# EAGLE board hexapod (EAGLE 4.90)
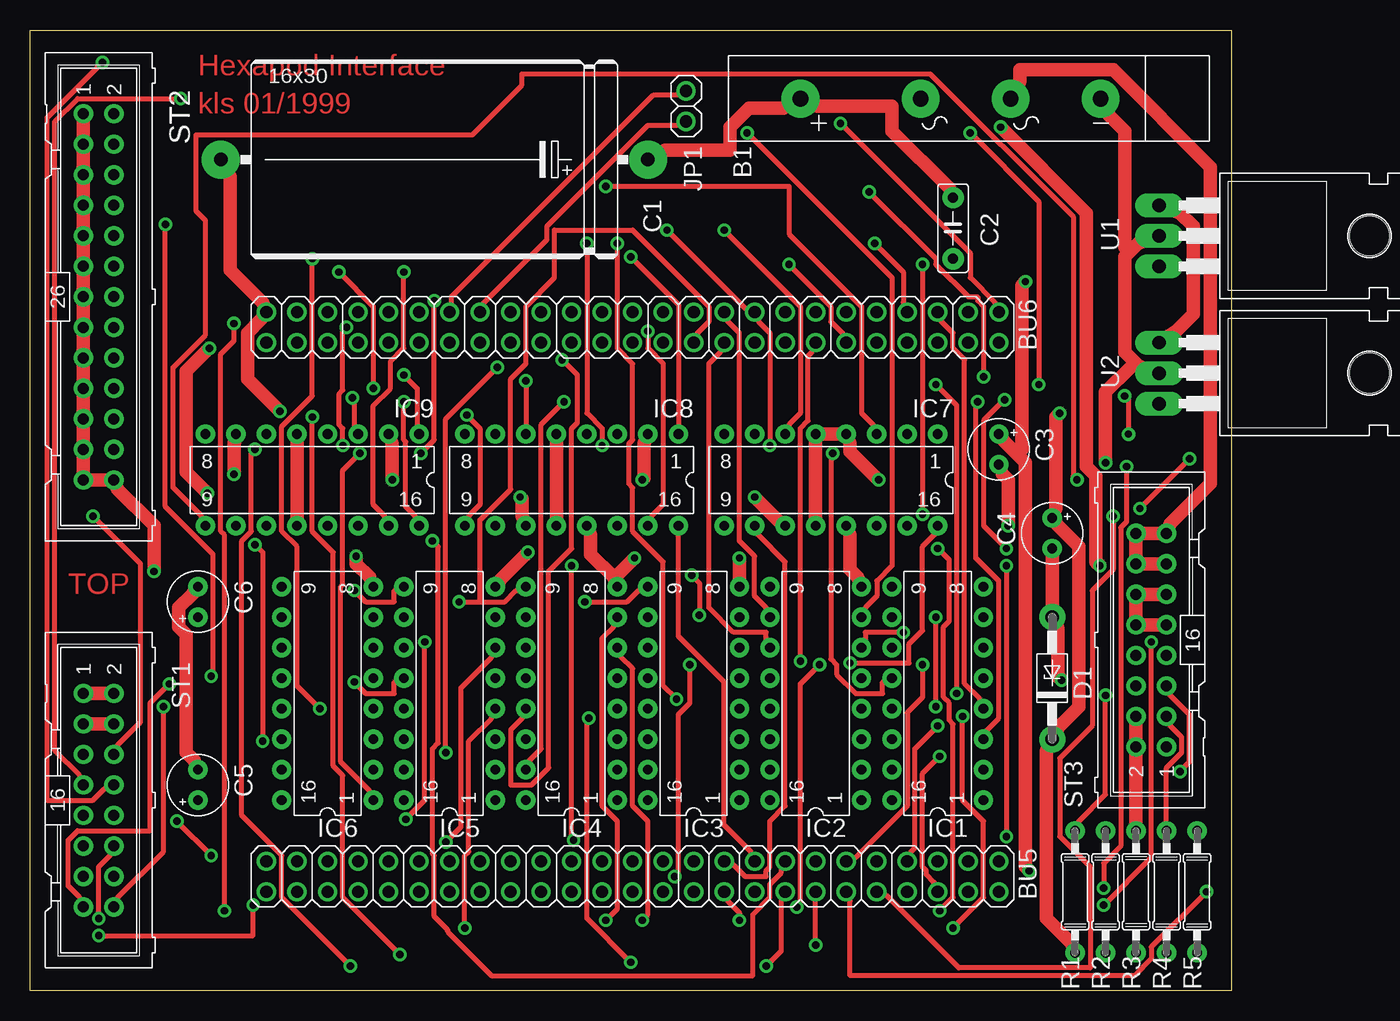
[diagram p0: board, top side]
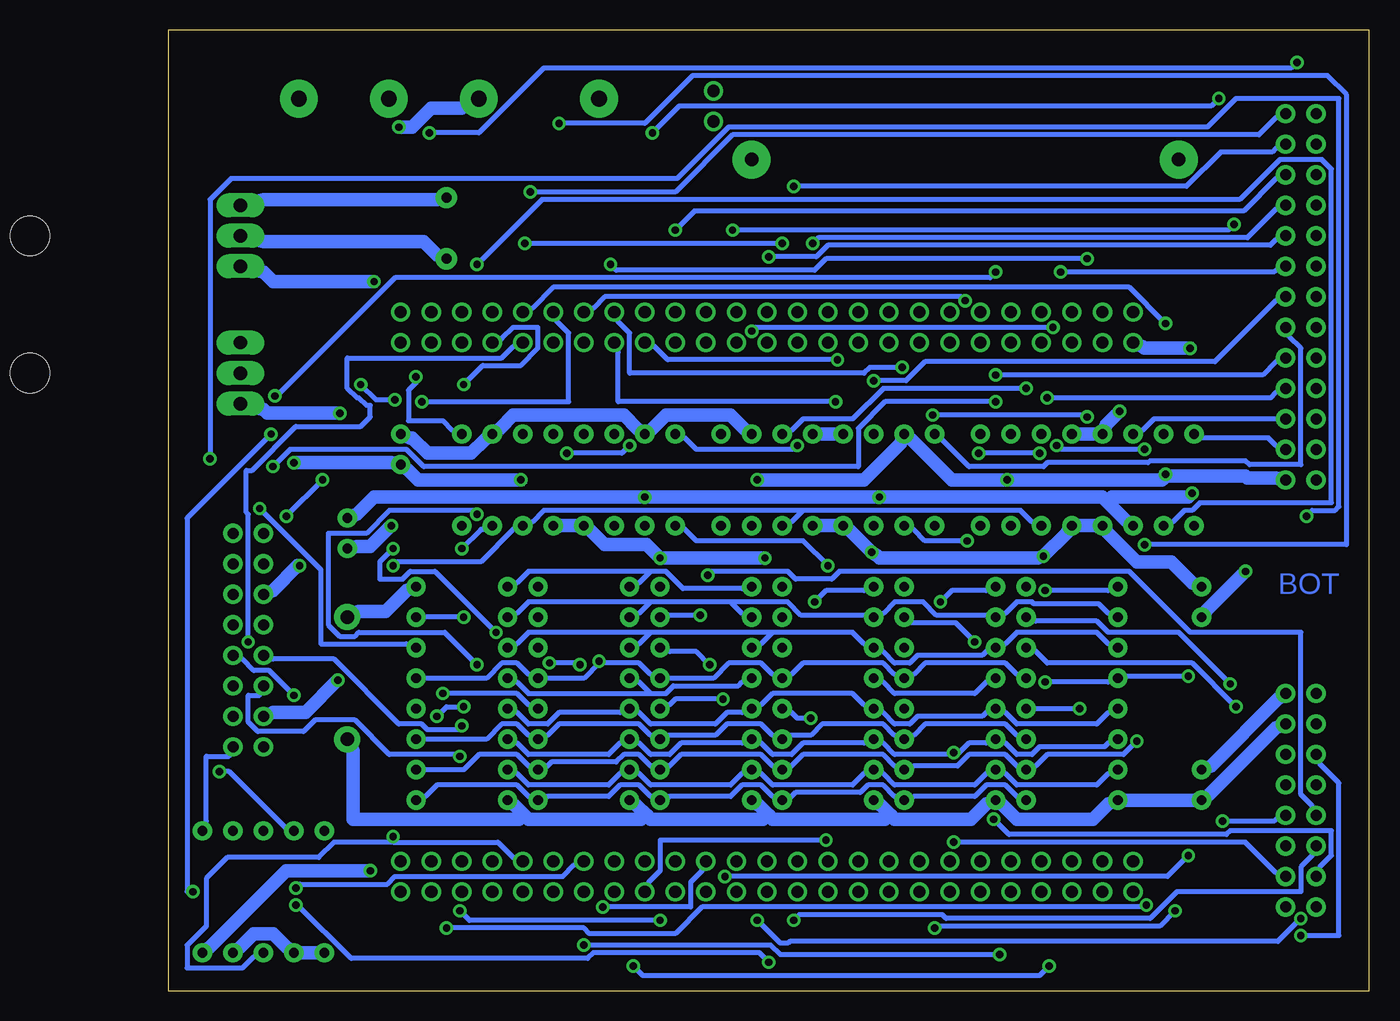
[diagram p1: board, bottom side, seen from below]

Size 100 x 80 mm. Coordinates in mm from the lower left corner, seen from the top.
Outline: 0,0 0,80 100,80 100,0 0,0
Copper layers (1*16): Top 0.035mm / dielectric 1.5mm / Bottom 0.035mm
Design rules "default": minimum track width 10mil, minimum drill 24mil, track to track 8mil, track to pad 8mil, pad to pad 8mil, via to via 8mil, smd to smd 8mil, copper to edge 40mil, drill to drill 8mil, minimum pad ring 10mil, minimum via ring 10mil, stop-mask expansion 0mil, vias tented up to drill 0mil, thermal gap 10mil
Net classes: 0 default: width 0.406 mm; 1 supply: width 1.143 mm

## Footprints (pad centres in the part's own frame; a part is rotated, then mirrored left to right if it is on the bottom)
FB100 = drill 1.321 pad 3.15 round: + 0,0; - 24.994,0; AC1 10.008,0; AC2 17.501,0
2X25 = drill 1.016 pad 1.6 round: 1 -30.48,-1.27; 2 -30.48,1.27; 3 -27.94,-1.27; 4 -27.94,1.27; 5 -25.4,-1.27; 6 -25.4,1.27; 7 -22.86,-1.27; 8 -22.86,1.27; 9 -20.32,-1.27; 10 -20.32,1.27; 11 -17.78,-1.27; 12 -17.78,1.27; 13 -15.24,-1.27; 14 -15.24,1.27; 15 -12.7,-1.27; 16 -12.7,1.27; 17 -10.16,-1.27; 18 -10.16,1.27; 19 -7.62,-1.27; 20 -7.62,1.27; 21 -5.08,-1.27; 22 -5.08,1.27; 23 -2.54,-1.27; 24 -2.54,1.27; 25 0,-1.27; 26 0,1.27; 27 2.54,-1.27; 28 2.54,1.27; 29 5.08,-1.27; 30 5.08,1.27; 31 7.62,-1.27; 32 7.62,1.27; 33 10.16,-1.27; 34 10.16,1.27; 35 12.7,-1.27; 36 12.7,1.27; 37 15.24,-1.27; 38 15.24,1.27; 39 17.78,-1.27; 40 17.78,1.27; 41 20.32,-1.27; 42 20.32,1.27; 43 22.86,-1.27; 44 22.86,1.27; 45 25.4,-1.27; 46 25.4,1.27; 47 27.94,-1.27; 48 27.94,1.27; 49 30.48,-1.27; 50 30.48,1.27
E35-16 = drill 1.118 pad 3.15 round: + -17.78,0; - 17.78,0
C5B2,5A = drill 0.813 pad 1.778 round: 1 -2.54,0; 2 2.54,0
E2,5-5 = drill 0.813 pad 1.6 round: + -1.27,0; - 1.27,0
DO41Z10 = drill 1.118 pad 2.159 round: A 5.08,0; K -5.08,0
DIL-16 = drill 0.813 pad 1.6 round: 1 -8.89,-3.81; 2 -6.35,-3.81; 3 -3.81,-3.81; 4 -1.27,-3.81; 5 1.27,-3.81; 6 3.81,-3.81; 7 6.35,-3.81; 8 8.89,-3.81; 9 8.89,3.81; 10 6.35,3.81; 11 3.81,3.81; 12 1.27,3.81; 13 -1.27,3.81; 14 -3.81,3.81; 15 -6.35,3.81; 16 -8.89,3.81
1X02 = drill 1.016 pad 1.6 round: 1 -1.27,0; 2 1.27,0
0207/10 = drill 0.813 pad 1.6 round: 1 -5.08,0; 2 5.08,0
0207/10@1 = drill 0.813 pad 1.6 round: 1 -5.08,0; 2 5.08,0
ML16 = drill 0.914 pad 1.6 round: 1 -8.89,-1.27; 2 -8.89,1.27; 3 -6.35,-1.27; 4 -6.35,1.27; 5 -3.81,-1.27; 6 -3.81,1.27; 7 -1.27,-1.27; 8 -1.27,1.27; 9 1.27,-1.27; 10 1.27,1.27; 11 3.81,-1.27; 12 3.81,1.27; 13 6.35,-1.27; 14 6.35,1.27; 15 8.89,-1.27; 16 8.89,1.27
ML26 = drill 0.914 pad 1.6 round: 1 -15.24,-1.27; 2 -15.24,1.27; 3 -12.7,-1.27; 4 -12.7,1.27; 5 -10.16,-1.27; 6 -10.16,1.27; 7 -7.62,-1.27; 8 -7.62,1.27; 9 -5.08,-1.27; 10 -5.08,1.27; 11 -2.54,-1.27; 12 -2.54,1.27; 13 0,-1.27; 14 0,1.27; 15 2.54,-1.27; 16 2.54,1.27; 17 5.08,-1.27; 18 5.08,1.27; 19 7.62,-1.27; 20 7.62,1.27; 21 10.16,-1.27; 22 10.16,1.27; 23 12.7,-1.27; 24 12.7,1.27; 25 15.24,-1.27; 26 15.24,1.27
TO220H = drill 1.118 pad 2 long: 1 -2.54,-6.35; 2 0,-6.35; 3 2.54,-6.35 | hole 3.302: 0,11.176

## Placement (x,y rotation side)
B1  FB100  [FB100]  64.14,74.3 0 top
BU5  PINHD-2X25  [2X25]  50.16,9.53 180 top
BU6  PINHD-2X25  [2X25]  50.16,55.24 180 top
C1  2200uF/35V  [E35-16]  33.66,69.22 180 top
C2  100nf  [C5B2,5A]  76.83,63.5 90 top
C3  4,7uf/35V  [E2,5-5]  80.64,45.09 270 top
C4  4,7uf/10V  [E2,5-5]  85.09,38.1 270 top
C5  4,7uf/10V  [E2,5-5]  13.97,17.14 90 top
C6  4,7uf/35V  [E2,5-5]  13.97,32.38 90 top
D1  BZX85  [DO41Z10]  85.09,26.04 90 top
IC1  HCTL2016  [DIL-16]  75.56,24.77 90 top
IC2  HCTL2016  [DIL-16]  65.41,24.77 90 top
IC3  HCTL2016  [DIL-16]  55.24,24.77 90 top
IC4  HCTL2016  [DIL-16]  45.09,24.77 90 top
IC5  HCTL2016  [DIL-16]  34.92,24.77 90 top
IC6  HCTL2016  [DIL-16]  24.77,24.77 90 top
IC7  DS3668  [DIL-16]  66.67,42.55 180 top
IC8  DS3668  [DIL-16]  45.09,42.55 180 top
IC9  DS3668  [DIL-16]  23.5,42.55 180 top
JP1  PINHD-1X2  [1X02]  54.61,73.66 270 top
R1  0207/10  [0207/10]  87,8.26 90 top
R2  0207/10  [0207/10]  89.53,8.26 90 top
R3  10k  [0207/10@1]  92.08,8.26 270 top
R4  0207/10  [0207/10]  94.61,8.26 90 top
R5  0207/10  [0207/10]  97.16,8.26 90 top
ST1  PINHD-2X8  [ML16]  5.71,15.88 270 top
ST2  PINHD-2X13  [ML26]  5.71,57.78 270 top
ST3  PINHD-2X8  [ML16]  93.34,29.21 90 top
U1  78S24  [TO220H]  100.33,62.87 270 top
U2  7805  [TO220H]  100.33,51.44 270 top

## Library data of the parts
B1 = RECTIF
BU5 BU6 JP1 = PINHEAD
C1 C3-C6 = ELKO
C2 = CAP-WI
D1 = diode
IC1-IC9 = klaus
R1-R5 = R
ST1-ST3 = ST-ML
U1 U2 = LINEAR

## Nets
!OE0: BU6.5 IC1.4
!OE1: BU6.8 IC2.4
!OE2: BU6.7 IC3.4
!OE3: BU6.10 IC4.4
!OE4: BU6.9 IC5.4
!OE5: BU6.12 IC6.4
!RST: BU6.14 IC1.5 IC2.5 IC3.5 IC4.5 IC5.5 IC6.5
+5V [supply]: BU6.50 C4.+ C5.+ D1.K IC1.16 IC2.16 IC3.16 IC4.16 IC5.16 IC6.16 IC7.11 IC8.11 IC9.11 R1.1 R2.1 R4.1 ST1.3 ST1.4 U2.3
+24V [supply]: C3.+ C6.+ IC7.2 IC7.7 IC8.2 IC8.7 IC9.2 IC9.7 R5.1 ST2.1 ST2.3 ST2.5 ST2.7 ST2.9 ST2.11 ST2.13 ST2.15 ST2.17 ST2.19 ST2.21 ST2.23 ST2.25 ST2.26 U1.3
AC1 [supply]: B1.AC1 ST3.9 ST3.10 ST3.11 ST3.12
AC2 [supply]: B1.AC2 ST3.13 ST3.14 ST3.15 ST3.16
CLK: BU6.1 IC1.2 IC2.2 IC3.2 IC4.2 IC5.2 IC6.2
COIL0: IC7.1 ST2.2
COIL1: IC7.3 ST2.4
COIL2: IC7.6 ST2.6
COIL3: IC7.8 ST2.8
COIL4: IC8.1 ST2.10
COIL5: IC8.3 ST2.12
COIL6: IC8.6 ST2.14
COIL7: IC8.8 ST2.16
COIL8: IC9.1 ST2.18
COIL9: IC9.3 ST2.20
COIL10: IC9.6 ST2.22
COIL11: IC9.8 ST2.24
D0: BU6.13 IC1.1 IC2.1 IC3.1 IC4.1 IC5.1 IC6.1
D1: BU6.16 IC1.15 IC2.15 IC3.15 IC4.15 IC5.15 IC6.15
D2: BU6.15 IC1.14 IC2.14 IC3.14 IC4.14 IC5.14 IC6.14
D3: BU6.18 IC1.13 IC2.13 IC3.13 IC4.13 IC5.13 IC6.13
D4: BU6.17 IC1.12 IC2.12 IC3.12 IC4.12 IC5.12 IC6.12
D5: BU6.20 IC1.11 IC2.11 IC3.11 IC4.11 IC5.11 IC6.11
D6: BU6.19 IC1.10 IC2.10 IC3.10 IC4.10 IC5.10 IC6.10
D7: BU6.22 IC1.9 IC2.9 IC3.9 IC4.9 IC5.9 IC6.9
EN: BU5.9 IC7.14 IC8.14 IC9.14 R3.2
ENC0: IC1.7 ST1.5
ENC1: IC1.6 ST1.6
ENC2: IC2.7 ST1.7
ENC3: IC2.6 ST1.8
ENC4: IC3.7 ST1.9
ENC5: IC3.6 ST1.10
ENC6: IC4.7 ST1.11
ENC7: IC4.6 ST1.12
ENC8: IC5.7 ST1.13
ENC9: IC5.6 ST1.14
ENC10: IC6.7 ST1.15
ENC11: IC6.6 ST1.16
GND [supply]: B1.- BU6.49 C1.- C2.1 C3.- C4.- C5.- C6.- D1.A IC1.8 IC2.8 IC3.8 IC4.8 IC5.8 IC6.8 IC7.4 IC7.5 IC7.12 IC7.13 IC8.4 IC8.5 IC8.12 IC8.13 IC9.4 IC9.5 IC9.12 IC9.13 R3.1 ST1.1 ST1.2 ST3.2 ST3.4 U1.2 U2.2
N$4: R5.2 ST3.1
N$5: R4.2 ST3.3
N$6: R2.2 ST3.5
N$7: R1.2 ST3.7
N$8: BU6.35 JP1.2
N$9: BU6.37 JP1.1
SEL: BU6.11 IC1.3 IC2.3 IC3.3 IC4.3 IC5.3 IC6.3
STATUS0: BU5.7 ST3.8
STATUS1: BU5.6 ST3.6
VALVE0: BU5.21 IC7.16
VALVE1: BU5.20 IC7.15
VALVE2: BU5.19 IC7.10
VALVE3: BU5.18 IC7.9
VALVE4: BU5.17 IC8.16
VALVE5: BU5.16 IC8.15
VALVE6: BU5.15 IC8.10
VALVE7: BU5.14 IC8.9
VALVE8: BU5.13 IC9.16
VALVE9: BU5.12 IC9.15
VALVE10: BU5.11 IC9.10
VALVE11: BU5.10 IC9.9
VIN [supply]: B1.+ C1.+ C2.2 U1.1 U2.1

## Tracks (layer width: path | path; a pad name or v marks a point on that pad's centre or on a via)
!OE0
  Top 0.406: IC1.4 79.06,24.29 77.79,25.56 77.79,52.55 76.83,53.5 76.83,54.77 75.88,55.72 BU6.5
!OE1  (via drill 0.61)
  Top 0.406: v77.15,24.77 77.15,48.74 v75.41,50.48
  Bottom 0.406: v77.15,24.77 70.96,24.77 70.01,23.81 IC2.4 | v75.41,50.48 73.82,52.07 70.64,52.07 69.22,53.5 69.22,55.24 71.28,55.24 72.23,54.29 BU6.8
!OE2  (via drill 0.61)
  Top 0.406: v53.82,24.29 52.7,25.4 52.7,35.72 50.16,38.26 50.16,41.91 49.85,42.23 49.85,45.56 50.16,45.88 50.16,52.23 48.9,53.5 v48.9,62.23 | v70.33,62.23 72.71,59.85 72.71,57.31 BU6.7
  Bottom 0.406: v53.82,24.29 57.78,24.29 58.26,23.81 IC3.4 | v48.9,62.23 v70.33,62.23
!OE3  (via drill 0.61)
  Top 0.406: v46.51,22.7 46.35,22.54 46.35,6.03 v50.01,2.38 | v89.38,7.14 93.34,11.11 v93.34,29.05
  Bottom 0.406: v46.51,22.7 47.62,22.7 48.1,23.18 IC4.4 | v50.01,2.38 50.8,3.17 64.61,3.17 65.09,2.7 84.77,2.7 89.22,7.14 v89.38,7.14 | v93.34,29.05 93.34,39.69 93.5,39.85 93.5,43.34 93.03,43.34 89.38,46.99 83.98,46.99 83.19,47.78 83.19,48.74 83.5,48.74 84.14,49.37 84.3,49.37 85.09,50.16 85.09,52.7 72.23,52.7 71.28,53.66 BU6.10
!OE4  (via drill 0.61)
  Top 0.406: v36.2,5.24 36.2,11.27 36.51,11.59 36.51,20.8 38.42,22.7 IC5.4 | v16.19,6.67 16.19,37.94 15.88,38.26 15.88,53.02 16.99,54.13 v16.99,55.56
  Bottom 0.406: v36.2,5.24 36.04,5.4 17.46,5.4 v16.19,6.67 | v16.99,55.56 20,58.58 67.94,58.58 69.69,56.83 BU6.9
!OE5  (via drill 0.61)
  Top 0.406: v24.13,23.5 22.23,25.4 22.23,36.99 20.95,38.26 20.95,46.99 23.5,49.53 v23.5,60.96 | v63.18,60.48 66.67,56.99 66.67,55.72 67.63,54.77 BU6.12
  Bottom 0.406: v24.13,23.5 27.78,23.5 IC6.4 | v23.5,60.96 45.24,60.96 46.2,60.01 62.71,60.01 v63.18,60.48
!RST  (via drill 0.61)
  Top 0.406: v64.14,27.46 64.14,46.83 64.77,47.47 64.77,52.86 65.09,53.18 BU6.14
  Bottom 0.406: IC6.5 29.37,26.35 30.32,27.3 36.99,27.3 37.94,26.35 IC5.5 39.53,26.35 40.48,27.3 47.15,27.3 48.1,26.35 IC4.5 49.69,26.35 50.64,27.3 53.34,27.3 54.61,26.04 58.26,26.04 IC3.5 59.85,26.35 60.8,27.3 64.14,27.3 | 64.14,27.3 65.41,26.04 68.42,26.04 IC2.5 70.01,26.35 70.96,27.3 72.23,27.3 73.5,26.04 78.58,26.04 IC1.5 | 64.14,27.3 v64.14,27.46
+5V  (via drill 0.61)
  Top 1.143: v40.8,41.12 40.96,40.96 40.96,39.53 IC8.11 | v60.33,41.12 62.23,39.21 IC7.11 | v14.92,53.5 13.02,51.59 13.02,43.18 v14.76,41.43 | v85.72,48.1 85.41,47.78 85.41,40.16 C4.+ 85.57,38.73 87.31,36.99 87.31,23.65 85.57,21.91 D1.K 84.61,20 84.61,6.03 86.68,3.97 R1.1 | ST1.3 5.24,22.23 6.19,22.23 ST1.4
  Bottom 1.143: 21.83,40.72 22.23,41.12 v40.8,41.12 v60.33,41.12 82.87,41.12 84.3,39.69 C4.+ | 21.83,40.72 20.32,39.21 IC9.11 | v14.92,53.5 18.73,53.5 18.89,53.66 BU6.50 | v14.76,41.43 15.08,41.12 21.43,41.12 21.83,40.72 | R1.1 87.79,3.17 88.74,3.17 R2.1 90.17,3.65 91.28,4.76 92.87,4.76 93.98,3.65 R4.1 | v85.72,48.1 91.76,48.1 92.08,48.42 U2.3 | ST1.4 7.78,21.91 13.34,16.35 C5.+ 14.76,15.88 20.16,15.88 IC6.16 21.75,15.56 23.02,14.29 29.37,14.29 30.48,15.4 IC5.16 31.91,15.56 33.18,14.29 39.53,14.29 39.93,14.68 | 39.93,14.68 40.64,15.4 IC4.16 | 50.09,14.68 49.69,14.29 40.32,14.29 39.93,14.68 | 50.09,14.68 50.8,15.4 IC3.16 | 60.25,14.68 59.85,14.29 50.48,14.29 50.09,14.68 | 60.25,14.68 60.96,15.4 IC2.16 | 70.41,14.68 70.01,14.29 60.64,14.29 60.25,14.68 | 70.41,14.68 71.12,15.4 IC1.16 | D1.K 84.61,20 84.61,14.29 70.8,14.29 70.41,14.68
+24V  (via drill 0.61)
  Top 1.143: v30.16,42.55 30.16,45.56 IC9.2 | ST2.1 ST2.3 ST2.5 ST2.7 ST2.9 ST2.11 ST2.13 ST2.15 ST2.17 ST2.19 ST2.21 ST2.23 ST2.25 5.24,42.55 6.19,42.55 ST2.26 7.3,41.75 10.32,38.73 v10.32,34.92 | v16.99,43.02 16.99,45.56 IC9.7 | v83.19,10 82.87,10.32 82.87,43.97 82.15,44.69 | 82.15,44.69 81.12,45.72 C3.+ | v82.87,59.05 82.55,58.74 82.55,45.09 82.15,44.69 | v50.96,42.55 51.12,42.7 51.12,45.56 IC8.2
  Bottom 1.143: v10.32,34.92 13.49,31.75 C6.+ | 16.91,42.94 16.83,42.86 10.32,42.86 10.16,42.7 7.78,42.7 ST2.26 | 16.91,42.94 v16.99,43.02 | 16.91,42.94 17.3,42.55 v30.16,42.55 34.77,42.55 38.1,45.88 IC8.7 39.05,45.56 42.07,42.55 v50.96,42.55 | IC8.2 52.07,46.83 53.18,47.94 58.58,47.94 59.69,46.83 IC7.7 60.96,46.83 62.07,47.94 71.28,47.94 72.39,46.83 IC7.2 73.66,45.88 74.77,44.77 78.42,44.77 79.69,46.04 79.85,46.04 C3.+ | v83.19,10 90.17,10 96.52,3.65 R5.1 | v82.87,59.05 91.28,59.05 92.08,59.85 U1.3
AC1  (via drill 0.61)
  Top 1.143: ST3.9 93.82,30.48 92.87,30.48 ST3.10 ST3.12 92.87,33.02 93.82,33.02 ST3.11 | v89.06,35.4 88.74,35.72 88.74,42.86 87.95,43.66 87.95,64.77 v80.8,71.91
  Bottom 1.143: v89.06,35.4 89.22,35.4 91.28,33.34 ST3.12 | v80.8,71.91 79.69,71.91 78.11,73.5 75.56,73.5 B1.AC1
AC2
  Top 1.143: ST3.13 93.82,35.56 92.87,35.56 ST3.14 ST3.16 92.87,38.1 93.82,38.1 ST3.15 94.93,38.89 98.27,42.23 98.27,68.58 90.17,76.68 82.39,76.68 82.39,75.72 B1.AC2
CLK  (via drill 0.61)
  Top 0.406: v67.47,72.23 78.26,61.44 78.26,59.37 80.33,57.31 BU6.1 | v18.73,37.15 19.37,36.51 v19.37,20.8
  Bottom 0.406: IC1.2 78.58,18.41 75.41,18.41 74.14,19.68 70.96,19.68 70.01,18.73 IC2.2 68.42,18.73 68.1,19.05 62.71,19.05 62.07,19.68 60.8,19.68 59.85,18.73 IC3.2 58.26,18.73 57.31,19.68 50.64,19.68 49.69,18.73 IC4.2 48.1,18.73 47.15,19.68 40.48,19.68 39.53,18.73 IC5.2 37.94,18.73 34.29,18.73 33.34,19.68 30.32,19.68 29.37,18.73 IC6.2 27.78,18.73 26.83,19.68 20.48,19.68 v19.37,20.8 | v67.47,72.23 60.33,72.23 56.36,76.2 3.49,76.2 1.91,74.61 1.91,37.15 v18.73,37.15
COIL0  (via drill 0.61)
  Top 0.406: v69.85,66.52 75.41,60.96 75.41,60.48 78.11,57.78 78.9,57.78 78.9,57.47 79.38,56.99 v79.38,51.12
  Bottom 0.406: v69.85,66.52 57.78,66.52 53.02,71.28 9.21,71.28 7.78,72.71 ST2.2 | v79.38,51.12 79.38,50.64 80.01,50.01 80.01,47.47 77.15,47.47 76.36,46.67 IC7.1
COIL1  (via drill 0.61)
  Top 0.406: v47.94,66.99 63.18,66.99 63.18,63.02 69.22,56.99 69.22,48.1 70.17,47.15 IC7.3
  Bottom 0.406: v47.94,66.99 15.24,66.99 12.38,69.85 8.1,69.85 7.78,70.17 ST2.4
COIL2  (via drill 0.61)
  Top 0.406: v57.78,63.34 64.14,56.99 64.14,48.1 63.18,47.15 IC7.6
  Bottom 0.406: v57.78,63.34 56.2,64.93 10.48,64.93 7.78,67.63 ST2.6
COIL3  (via drill 0.61)
  Top 0.406: v46.35,62.23 46.35,48.1 47.62,46.83 v47.62,45.4
  Bottom 0.406: v46.35,62.23 45.88,62.71 10.16,62.71 7.78,65.09 ST2.8 | v47.62,45.4 47.94,45.09 56.04,45.09 56.99,46.04 IC7.8
COIL4  (via drill 0.61)
  Top 0.406: v50.01,61.12 53.98,57.15 IC8.1
  Bottom 0.406: v50.01,61.12 46.04,61.12 45.09,62.07 8.26,62.07 7.78,62.55 ST2.10
COIL5  (via drill 0.61)
  Top 0.406: v25.72,59.85 28.57,56.99 v28.57,50.16
  Bottom 0.406: v25.72,59.85 7.94,59.85 7.78,60.01 ST2.12 | v28.57,50.16 40.48,50.16 43.02,47.62 47.15,47.62 48.1,46.67 IC8.3
COIL6  (via drill 0.61)
  Top 0.406: v41.27,50.8 IC8.6
  Bottom 0.406: v41.27,50.8 38.58,50.8 36.99,52.39 12.86,52.39 7.78,57.47 ST2.14
COIL7
  Bottom 0.406: ST2.16 6.67,54.45 5.71,53.5 5.71,43.81 10,43.81 10.32,44.13 18.26,44.13 18.41,43.97 26.83,43.97 27.15,43.66 33.34,43.66 35.56,45.88 IC8.8
COIL8  (via drill 0.61)
  Top 0.406: v31.11,51.28 32.23,50.16 32.23,47.15 IC9.1
  Bottom 0.406: v31.11,51.28 8.89,51.28 7.78,52.39 ST2.18
COIL9  (via drill 0.61)
  Top 0.406: v26.83,49.37 26.99,49.21 26.99,47.15 IC9.3
  Bottom 0.406: v26.83,49.37 8.26,49.37 7.78,49.85 ST2.20
COIL10
  Bottom 0.406: ST2.22 7.78,47.62 17.94,47.62 18.89,46.67 IC9.6
COIL11
  Bottom 0.406: ST2.24 7.78,45.4 8.41,46.04 13.81,46.04 IC9.8
D0  (via drill 0.61)
  Top 0.406: v33.66,57.47 33.66,45.88 v32.54,44.77 | v27.46,44.77 26.04,43.34 26.04,33.81 25.88,33.66 25.88,19.05 28.26,16.67 IC6.1
  Bottom 0.406: IC1.1 78.58,16.19 77.63,17.14 70.96,17.14 70.01,16.19 IC2.1 68.42,16.19 63.34,16.19 62.39,17.14 60.8,17.14 59.85,16.19 IC3.1 58.26,16.19 53.18,16.19 52.23,17.14 50.64,17.14 49.69,16.19 IC4.1 48.1,16.19 47.78,16.51 42.39,16.51 41.75,17.14 40.48,17.14 39.53,16.19 IC5.1 37.94,16.19 32.86,16.19 31.91,17.14 30.32,17.14 29.37,16.19 IC6.1 | v33.66,57.47 33.97,57.78 63.66,57.78 64.61,56.83 BU6.13 | v27.46,44.77 v32.54,44.77
D1  (via drill 0.61)
  Top 0.406: v44.45,49.05 42.55,47.15 42.55,20.16 41.59,19.21 IC4.15
  Bottom 0.406: IC1.15 70.96,18.1 70.01,17.14 63.34,17.14 62.39,18.1 IC2.15 60.8,18.1 59.85,17.14 53.18,17.14 52.23,18.1 IC3.15 50.64,18.1 49.69,17.14 43.02,17.14 42.07,18.1 IC4.15 40.48,18.1 39.53,17.14 32.86,17.14 31.91,18.1 IC5.15 30.32,18.1 29.37,17.14 22.7,17.14 21.75,18.1 IC6.15 | v44.45,49.05 62.55,49.05 62.55,53.18 BU6.16
D2  (via drill 0.61)
  Top 0.406: v38.89,51.91 34.61,47.62 v34.61,19.84
  Bottom 0.406: IC1.14 70.96,20.64 70.01,19.68 63.34,19.68 62.39,20.64 IC2.14 60.8,20.64 59.85,19.68 58.26,19.68 57.31,20.64 52.23,20.64 IC3.14 50.64,20.64 49.69,19.68 48.1,19.68 47.15,20.64 42.07,20.64 IC4.14 40.48,20.64 39.53,19.68 34.61,19.68 | IC6.14 21.75,20.64 22.07,20.32 27.46,20.32 28.1,19.68 29.37,19.68 30.32,20.64 IC5.14 31.91,20.64 33.34,20.64 34.29,19.68 34.61,19.68 | v38.89,51.91 41.59,51.91 42.07,51.44 61.59,51.44 61.59,54.77 62.55,55.72 BU6.15 | 34.61,19.68 v34.61,19.84
D3  (via drill 0.61)
  Top 0.406: v44.29,52.55 45.56,51.28 45.56,47.31 45.09,46.83 45.09,36.83 43.18,34.92 43.18,18.57 41.75,17.14 40.01,17.14 40.01,21.75 40.96,22.7 IC4.13
  Bottom 0.406: IC6.13 21.75,23.18 22.7,22.23 29.37,22.23 30.32,23.18 IC5.13 31.91,23.18 32.23,22.86 37.62,22.86 38.26,22.23 39.53,22.23 40.48,23.18 IC4.13 42.07,23.81 43.02,24.77 49.69,24.77 50.64,23.81 IC3.13 52.23,23.18 53.5,23.18 54.45,22.23 59.85,22.23 60.8,23.18 IC2.13 62.39,23.18 67.47,23.18 68.42,22.23 70.01,22.23 70.96,23.18 IC1.13 | v44.29,52.55 58.42,52.55 59.53,53.66 BU6.18
D4  (via drill 0.61)
  Top 0.406: v26.99,25.72 27.94,24.77 30.32,24.77 30.32,25.72 IC5.12 | v61.59,45.4 61.59,54.77 60.64,55.72 BU6.17 59.53,56.83 v53.02,63.34 | v66.83,44.77 66.67,44.61 66.67,27.62 67.15,27.15 67.15,26.35 68.74,24.77 70.96,24.77 70.96,25.72 IC1.12 | v15.08,26.19 15.24,26.35 15.24,36.35 11.27,40.32 v11.27,63.82
  Bottom 0.406: v26.99,25.72 21.75,25.72 IC6.12 20.16,26.19 v15.08,26.19 | IC4.12 40.48,25.72 39.53,24.77 32.86,24.77 31.91,25.72 IC5.12 | 59.85,24.77 58.58,24.77 57.94,25.4 52.55,25.4 52.23,25.72 IC3.12 | 59.85,24.77 60.8,25.72 IC2.12 | IC1.12 70.96,25.72 70.01,24.77 59.85,24.77 | v61.59,45.4 62.23,44.77 v66.83,44.77 | v11.27,63.82 11.75,63.34 v53.02,63.34
D5
  Top 0.406: BU6.20 57.47,53.18 56.52,52.23 56.52,31.91 58.58,29.84 61.28,29.84 61.28,29.37 IC2.11
  Bottom 0.406: IC6.11 21.75,28.89 22.7,29.84 29.37,29.84 30.32,28.89 IC5.11 31.91,28.26 32.23,27.94 37.62,27.94 38.26,27.3 39.53,27.3 40.48,28.26 IC4.11 42.07,28.89 43.02,29.84 49.69,29.84 | 49.69,29.84 50.64,28.89 IC3.11 | 59.93,29.77 59.85,29.84 49.69,29.84 | 59.93,29.77 60.8,28.89 IC2.11 | IC1.11 70.96,28.89 70.01,29.84 60.01,29.84 59.93,29.77
D6
  Top 0.406: BU6.19 58.1,55.72 59.05,54.77 59.05,37.47 60.33,36.2 60.33,32.86 61.28,31.91 IC2.10
  Bottom 0.406: IC6.10 21.75,31.43 22.54,32.23 27.94,32.23 28.1,32.38 29.37,32.38 30.32,31.43 IC5.10 31.91,31.27 36.04,31.27 37.15,32.38 39.53,32.38 40.48,31.43 IC4.10 42.07,31.27 47.31,31.27 48.42,32.38 53.02,32.38 53.1,32.31 | 53.1,32.31 53.18,32.38 59.85,32.38 | 53.1,32.31 52.23,31.43 IC3.10 | 59.85,32.38 60.8,31.43 IC2.10 | IC1.10 70.96,31.43 70.01,32.38 59.85,32.38
D7  (via drill 0.61)
  Top 0.406: v26.99,33.34 27.94,32.38 30.32,32.38 30.32,33.34 IC5.9 | v35.72,32.38 37.47,32.38 | 37.47,32.38 39.53,32.38 40.48,33.34 IC4.9 | BU6.22 55.56,54.77 56.52,55.72 56.52,56.99 50.16,63.34 43.66,63.34 43.66,59.37 41.27,56.99 41.27,52.23 40.01,50.96 40.01,41.75 37.47,39.21 37.47,32.38 | v46.2,32.38 49.69,32.38 50.64,33.34 IC3.9
  Bottom 0.406: 59.85,34.92 58.58,34.92 57.15,33.5 52.23,33.5 IC3.9 | 59.85,34.92 60.8,33.97 IC2.9 | IC1.9 70.96,33.97 70.01,34.92 59.85,34.92 | v26.99,33.34 21.75,33.34 IC6.9 | v35.72,32.38 34.77,33.34 31.91,33.34 IC5.9 | v46.2,32.38 45.24,33.34 42.07,33.34 IC4.9
EN  (via drill 0.61)
  Top 0.406: v81.28,35.4 v81.28,12.86
  Bottom 0.406: 81.28,12.38 86.2,12.38 87.47,11.11 95.09,11.11 96.84,9.37 96.84,5.4 98.42,3.81 98.42,1.91 93.82,1.91 92.87,2.86 R3.2 | 81.28,12.38 72.55,12.38 71.28,11.11 BU5.9 | 47.15,40.01 29.05,40.01 28.1,39.05 IC9.14 | 47.15,40.01 48.1,39.05 IC8.14 | 47.15,40.01 68.74,40.01 69.69,39.05 IC7.14 71.28,38.42 73.98,35.72 80.96,35.72 v81.28,35.4 | v81.28,12.86 81.28,12.38
ENC0  (via drill 0.61)
  Top 0.406: v5.71,4.6 18.57,4.6 v18.57,7.14 | v76.83,5.24 79.38,7.78 79.38,14.13 77.63,15.88 v77.63,22.86 | v75.41,23.65 v75.41,31.11
  Bottom 0.406: v5.71,4.6 2.54,4.6 2.54,17.3 4.13,18.89 ST1.5 | v18.57,7.14 18.73,6.99 55.56,6.99 57.78,4.76 64.93,4.76 65.41,5.24 v76.83,5.24 | v77.63,22.86 76.83,23.65 v75.41,23.65 | v75.41,31.11 78.58,31.11 IC1.7
ENC1  (via drill 0.61)
  Top 0.406: v5.24,39.53 9.21,35.56 9.21,22.38 7.3,20.48 ST1.6 | v96.52,44.29 v92.39,40.16
  Bottom 0.406: v5.24,39.53 4.76,40.01 2.86,40.01 2.54,40.32 2.54,74.3 11.11,74.3 13.49,71.91 53.34,71.91 57.63,67.63 94.77,67.63 96.52,65.88 v96.52,44.29 | v92.39,40.16 87.31,35.08 87.31,28.89 80.17,28.89 IC1.6
ENC2  (via drill 0.61)
  Top 0.406: v12.54,74.3 3.97,74.3 2.06,72.39 2.06,20 4.13,17.94 ST1.7 | v59.69,71.44 71.75,59.37 71.75,35.4 70.48,34.13 70.48,32.86 69.53,31.91 IC2.7
  Bottom 0.406: v12.54,74.3 13.18,73.66 57.47,73.66 v59.69,71.44
ENC3  (via drill 0.61)
  Top 0.406: v6.03,77.31 1.43,72.71 1.43,15.88 5.24,15.88 6.19,16.83 ST1.8 | v78.26,71.44 83.98,65.72 v83.98,50.48 | v81.12,49.21 79.38,47.47 79.38,38.73 v81.28,36.83 | v72.71,29.84 69.53,29.84 69.53,29.37 IC2.6
  Bottom 0.406: v6.03,77.31 6.51,76.83 68.74,76.83 74.14,71.44 v78.26,71.44 | v83.98,50.48 82.71,49.21 v81.12,49.21 | v81.28,36.83 82.39,35.72 82.39,34.29 80.49,34.29 79.85,34.92 77.79,34.92 v72.71,29.84
ENC4  (via drill 0.61)
  Top 0.406: v55.09,34.61 55.72,33.97 v55.72,31.27
  Bottom 0.406: v55.09,34.61 54.77,34.92 48.42,34.92 47.78,34.29 44.77,34.29 44.13,34.92 20,34.92 14.92,29.84 5.71,29.84 5.71,16.35 4.76,15.4 ST1.9 | v55.72,31.27 58.26,31.27 IC3.7
ENC5  (via drill 0.61)
  Top 0.406: v12.22,14.13 v15.08,11.27 | v53.66,9.53 53.98,9.84 53.98,23.02 54.93,23.97 v54.93,27.15
  Bottom 0.406: v12.22,14.13 7.94,14.13 7.78,14.29 ST1.10 | v15.08,11.27 16.83,9.53 v53.66,9.53 | v54.93,27.15 56.04,28.26 58.26,28.26 IC3.6
ENC6  (via drill 0.61)
  Top 0.406: v47.94,5.87 48.9,6.83 48.9,14.13 47.62,15.4 47.62,29.37 48.58,30.32 IC4.7
  Bottom 0.406: v47.94,5.87 47.47,6.35 35.56,6.35 35.24,6.03 18.26,6.03 16.03,8.26 5.71,8.26 5.71,10.32 4.76,11.27 ST1.11
ENC7  (via drill 0.61)
  Top 0.406: v5.71,6.03 5.71,10.32 6.67,11.27 ST1.12 | v50.96,5.87 51.44,6.35 51.44,14.13 50.16,15.4 50.16,26.83 49.21,27.78 IC4.6
  Bottom 0.406: v5.71,6.03 7.62,4.13 48.26,4.13 48.42,3.97 49.05,3.97 v50.96,5.87
ENC8  (via drill 0.61)
  Top 0.406: v31.27,14.29 32.86,15.88 v32.86,29.05
  Bottom 0.406: v31.27,14.29 30,13.02 11.91,13.02 11.59,13.34 3.17,13.34 3.17,11.27 4.13,10.32 ST1.13 | v32.86,29.05 34.45,30.64 38.1,30.64 IC5.7
ENC9  (via drill 0.61)
  Top 0.406: v34.61,12.38 35.88,13.65 35.88,25.24 38.42,27.78 IC5.6
  Bottom 0.406: v34.61,12.38 10.32,12.38 7.78,9.84 ST1.14
ENC10  (via drill 0.61)
  Top 0.406: v11.59,25.56 10,23.97 10,13.34 3.97,13.34 3.17,12.54 3.17,8.73 4.13,7.78 ST1.15
  Bottom 0.406: v11.59,25.56 15.88,29.84 21.75,29.84 22.7,30.8 27.78,30.8 IC6.7
ENC11  (via drill 0.61)
  Top 0.406: v11.11,23.65 11.11,11.59 7.3,7.78 ST1.16
  Bottom 0.406: v11.11,23.65 14.76,27.3 26.83,27.3 27.78,28.26 IC6.6
GND  (via drill 0.61)
  Top 1.143: 92,52.31 91.12,53.18 91.12,61.12 91.52,61.52 | 92,52.31 92.23,52.07 U2.2 | 91.52,61.52 92.23,62.23 U1.2 | B1.- 89.85,72.87 91.12,71.6 91.12,61.91 91.52,61.52 | R3.1 ST3.2 ST3.4 | C4.- D1.A 85.57,30.16 85.57,26.19 v85.88,25.88 | v81.44,38.73 81.44,42.55 80.96,43.02 C3.- | v59.05,36.04 IC3.8 | IC2.8 68.9,34.45 68.26,35.08 68.26,37.94 IC7.13 | IC7.12 IC7.5 66.2,46.35 67.15,46.35 IC7.4 68.26,45.56 68.26,44.93 v70.64,42.55 | v41.43,36.51 39.21,34.29 IC5.8 | 48.58,34.45 46.67,36.35 46.67,37.94 IC8.13 | 48.58,34.45 IC4.8 | IC8.12 IC8.5 | C1.- 16.67,67.79 16.67,60.01 19.37,57.31 BU6.49 19.21,55.88 18.1,54.77 18.1,50.96 v20.8,48.26 | ST1.1 5.24,24.77 6.19,24.77 ST1.2 | v27.15,36.2 27.15,35.56 28.26,34.45 IC6.8 | IC9.12 IC9.5 | C5.- 13.65,19.21 13.02,19.84 13.02,29.69 12.38,30.32 12.38,31.91 13.49,33.02 C6.- | v50.32,36.04 49.05,34.77 48.58,34.45 | v89.53,43.97 89.53,49.85 91.6,51.91 92,52.31
  Bottom 1.143: C2.1 77.63,61.28 78.74,62.39 92.08,62.39 U1.2 | IC1.8 80.17,33.34 81.92,31.59 84.14,31.59 D1.A | v81.44,38.73 83.19,36.99 84.3,36.99 C4.- | v85.88,25.88 88.58,23.18 91.28,23.18 ST3.4 | IC7.13 67.15,38.73 66.2,38.73 IC7.12 64.77,38.26 63.66,37.15 60.17,37.15 v59.05,36.04 v50.32,36.04 | IC8.5 44.61,46.35 45.56,46.35 IC8.4 | IC8.13 45.56,38.73 44.61,38.73 IC8.12 43.18,38.26 v41.43,36.51 40.96,36.2 40.8,36.04 27.62,36.04 v27.15,36.2 25.24,38.1 IC9.13 23.97,38.73 23.02,38.73 IC9.12 21.75,38.1 19.37,35.72 16.51,35.72 14.76,33.97 C6.- | C5.- 13.18,18.73 7.62,24.29 ST1.2 | IC9.4 23.97,46.35 23.02,46.35 IC9.5 21.91,47.15 v20.8,48.26 | v70.64,42.55 79.22,42.55 80.01,43.34 C3.- 81.44,43.97 v89.53,43.97
N$4
  Bottom 0.406: R5.2 96.84,14.13 96.84,19.53 94.93,19.53 ST3.1
N$5
  Top 0.406: R4.2 94.61,18.57 95.89,19.84 95.89,21.11 94.93,22.07 ST3.3
N$6  (via drill 0.61)
  Top 0.406: v95.73,18.26 96.52,19.05 96.52,23.02 94.93,24.61 ST3.5
  Bottom 0.406: v95.73,18.26 94.93,18.26 90.33,13.65 R2.2
N$7  (via drill 0.61)
  Top 0.406: v89.53,24.61 89.53,16.35 87.31,14.13 R1.2
  Bottom 0.406: v89.53,24.61 91.6,26.67 92.87,26.67 93.82,27.62 ST3.7
N$8
  Top 0.406: BU6.35 37.78,57.31 43.02,62.55 43.02,63.66 51.44,72.07 53.82,72.07 JP1.2
N$9
  Top 0.406: BU6.37 35.08,57.31 35.08,57.78 51.91,74.61 53.82,74.61 JP1.1
SEL  (via drill 0.61)
  Top 0.406: v78.9,49.05 78.74,48.9 78.74,36.04 80.64,34.13 80.64,22.7 79.69,21.75 IC1.3
  Bottom 0.406: IC6.3 29.37,21.27 30.32,22.23 36.99,22.23 37.94,21.27 IC5.3 39.53,21.27 40.48,22.23 45.56,22.23 46.51,21.27 48.1,21.27 IC4.3 49.69,21.27 50.64,22.23 53.5,22.23 54.45,21.27 58.26,21.27 IC3.3 59.85,21.27 60.8,22.23 67.47,22.23 68.42,21.27 IC2.3 70.01,21.27 70.96,22.23 72.23,22.23 73.5,20.95 78.58,20.95 IC1.3 | v78.9,49.05 66.67,49.05 66.67,54.77 67.63,55.72 BU6.11
STATUS0  (via drill 0.61)
  Top 0.406: v75.56,22.07 73.66,20.16 73.66,11.91 73.34,11.59 BU5.7
  Bottom 0.406: v75.56,22.07 75.88,21.75 78.42,21.75 78.9,22.23 80.8,22.23 86.2,27.62 91.28,27.62 ST3.8
STATUS1  (via drill 0.61)
  Top 0.406: v75.72,19.53 74.3,18.1 74.3,10.32 74.61,10 74.61,9.68 75.25,9.05 BU5.6
  Bottom 0.406: v75.72,19.53 75.88,19.68 81.6,19.68 84.45,22.54 87.79,22.54 88.74,21.59 92.55,21.59 93.34,22.38 93.34,24.61 92.39,24.61 ST3.6
VALVE0  (via drill 0.61)
  Top 0.406: v63.82,6.99 64.14,7.3 64.14,25.56 v65.72,27.15 | v68.26,27.3 73.18,27.3 73.18,28.89 74.3,30 74.3,36.99 75.25,37.94 IC7.16
  Bottom 0.406: v63.82,6.99 56.52,6.99 56.52,9.05 55.56,10 BU5.21 | v65.72,27.15 65.88,27.3 v68.26,27.3
VALVE1  (via drill 0.61)
  Top 0.406: v59.05,5.87 59.05,6.51 58.1,7.46 BU5.20 | v75.72,6.67 76.83,7.78 76.83,22.23 76.52,22.54 76.52,23.97 76.04,24.45 76.04,30.32 76.52,30.8 76.52,35.88 v75.56,36.83
  Bottom 0.406: v59.05,5.87 74.93,5.87 v75.72,6.67 | v75.56,36.83 73.98,38.42 73.82,38.42 IC7.15
VALVE2
  Top 0.406: BU5.19 58.58,10.48 59.53,9.53 61.28,9.53 61.28,10 61.59,10.32 61.59,14.13 62.87,15.4 62.87,35.72 60.64,37.94 IC7.10
VALVE3  (via drill 0.61)
  Top 0.406: v45.24,12.54 45.09,12.7 v45.09,35.4
  Bottom 0.406: v45.24,12.54 59.05,12.54 59.05,10 60.01,9.05 BU5.18 | v45.09,35.4 47.15,37.47 56.04,37.47 56.99,38.42 IC7.9
VALVE4
  Top 0.406: IC8.16 53.98,29.53 57.78,25.72 57.78,13.81 60.01,11.59 BU5.17
VALVE5  (via drill 0.61)
  Top 0.406: v51.44,54.93 51.44,53.5 52.7,52.23 52.7,40.48 51.75,39.53 IC8.15 | v26.35,55.24 26.04,54.93 26.04,50.01 25.72,49.69 25.72,47.15 26.04,46.83 v26.04,45.4 | v18.73,45.09 18.41,44.77 18.41,38.26 17.62,37.47 17.62,14.61 20.95,11.27 20.95,7.78 v26.67,2.06 | v61.28,2.06 62.55,3.33 62.55,7.46 BU5.16
  Bottom 0.406: v51.44,54.93 51.12,55.24 v26.35,55.24 | v26.04,45.4 25.72,45.09 v18.73,45.09 | v26.67,2.06 27.46,1.27 60.48,1.27 v61.28,2.06
VALVE6  (via drill 0.61)
  Top 0.406: v33.5,37.47 33.97,36.99 33.97,20.64 33.5,20.16 33.5,11.43 33.66,11.27 33.66,6.19 34.77,5.08 34.77,4.92 38.42,1.27 60.17,1.27 60.17,6.35 61.59,7.78 61.59,8.89 62.55,9.84 62.55,10 BU5.15
  Bottom 0.406: v33.5,37.47 36.99,37.47 37.94,38.42 IC8.10
VALVE7  (via drill 0.61)
  Top 0.406: v30.8,3.02 26.04,7.78 26.04,17.94 25.24,18.73 25.24,36.51 23.5,38.26 v23.5,47.78 | v36.35,47.94 37.47,46.83 37.47,40.48 36.51,39.53 IC8.9 | v65.41,3.81 BU5.14
  Bottom 0.406: v65.41,3.81 49.85,3.81 49.05,3.02 v30.8,3.02 | v23.5,47.78 23.65,47.94 v36.35,47.94
VALVE8  (via drill 0.61)
  Top 0.406: v31.11,49.05 31.11,45.88 31.27,45.72 31.27,40.32 32.07,39.53 IC9.16 | v91.28,43.66 91.28,39.05 90.81,38.58 90.81,12.06 89.38,10.64 v89.38,8.57
  Bottom 0.406: v31.11,49.05 40.32,49.05 42.55,46.83 42.55,43.66 78.74,43.66 80.17,45.09 89.85,45.09 v91.28,43.66 | v89.38,8.57 89.06,8.89 81.76,8.89 81.12,9.53 67.15,9.53 66.2,10.48 BU5.13
VALVE9  (via drill 0.61)
  Top 0.406: v31.11,59.85 31.11,53.5 30,52.39 30,50.16 28.57,48.74 28.57,40.48 29.53,39.53 IC9.15 | v91.12,49.53 91.44,49.21 v91.44,46.35 | v97.95,8.26 93.34,3.65 93.34,2.7 91.92,1.27 68.26,1.27 68.26,7.46 BU5.12
  Bottom 0.406: v31.11,59.85 31.59,59.37 81.12,59.37 90.96,49.53 v91.12,49.53 | v91.44,46.35 98.42,39.37 98.42,8.26 v97.95,8.26
VALVE10  (via drill 0.61)
  Top 0.406: v74.3,27.15 74.3,24.45 73.03,23.18 73.03,15.4 68.74,11.11 BU5.11 | v74.3,60.48 v74.3,39.69
  Bottom 0.406: v74.3,27.15 76.99,29.84 84.14,29.84 84.45,29.53 85.72,29.53 86.68,30.48 86.68,38.1 83.5,38.1 81.6,40.01 74.61,40.01 v74.3,39.69 | v74.3,60.48 68.9,65.88 10.79,65.88 7.46,69.22 3.97,69.22 3.17,68.42 3.17,40.64 14.13,40.64 14.76,40.01 15.4,40.01 16.35,39.05 IC9.10
VALVE11  (via drill 0.61)
  Top 0.406: v90.17,39.53 90.17,35.08 88.42,33.34 88.42,22.07 85.72,19.37 85.72,12.86 88.27,10.32 88.27,1.91 77.31,1.91 71.28,7.94 BU5.10 | v87.15,42.55 86.84,42.86 86.84,64.45 74.93,76.36 40.96,76.36 40.96,75.41 36.83,71.28 13.81,71.28 13.81,64.93 14.61,64.14 14.61,54.61 11.91,51.91 11.91,41.91 14.29,39.53 IC9.9
  Bottom 0.406: v87.15,42.55 v90.17,39.53
VIN
  Top 1.143: C1.+ 52.86,70.01 58.26,70.01 58.26,71.91 59.85,73.5 62.71,73.5 B1.+ 65.56,73.66 71.75,73.66 71.75,71.6 76.52,66.83 C2.2 | U2.1 95.41,54.93 96.84,56.36 96.84,63.66 95.73,64.77 U1.1
  Bottom 1.143: C2.2 77.63,65.88 92.08,65.88 U1.1

## Text on the board
Top: Hexapod Interface | kls 01/1999 | TOP
Bottom: BOT